# EAGLE board cdf-modular-bridge-rev3 (EAGLE 7.3.0)
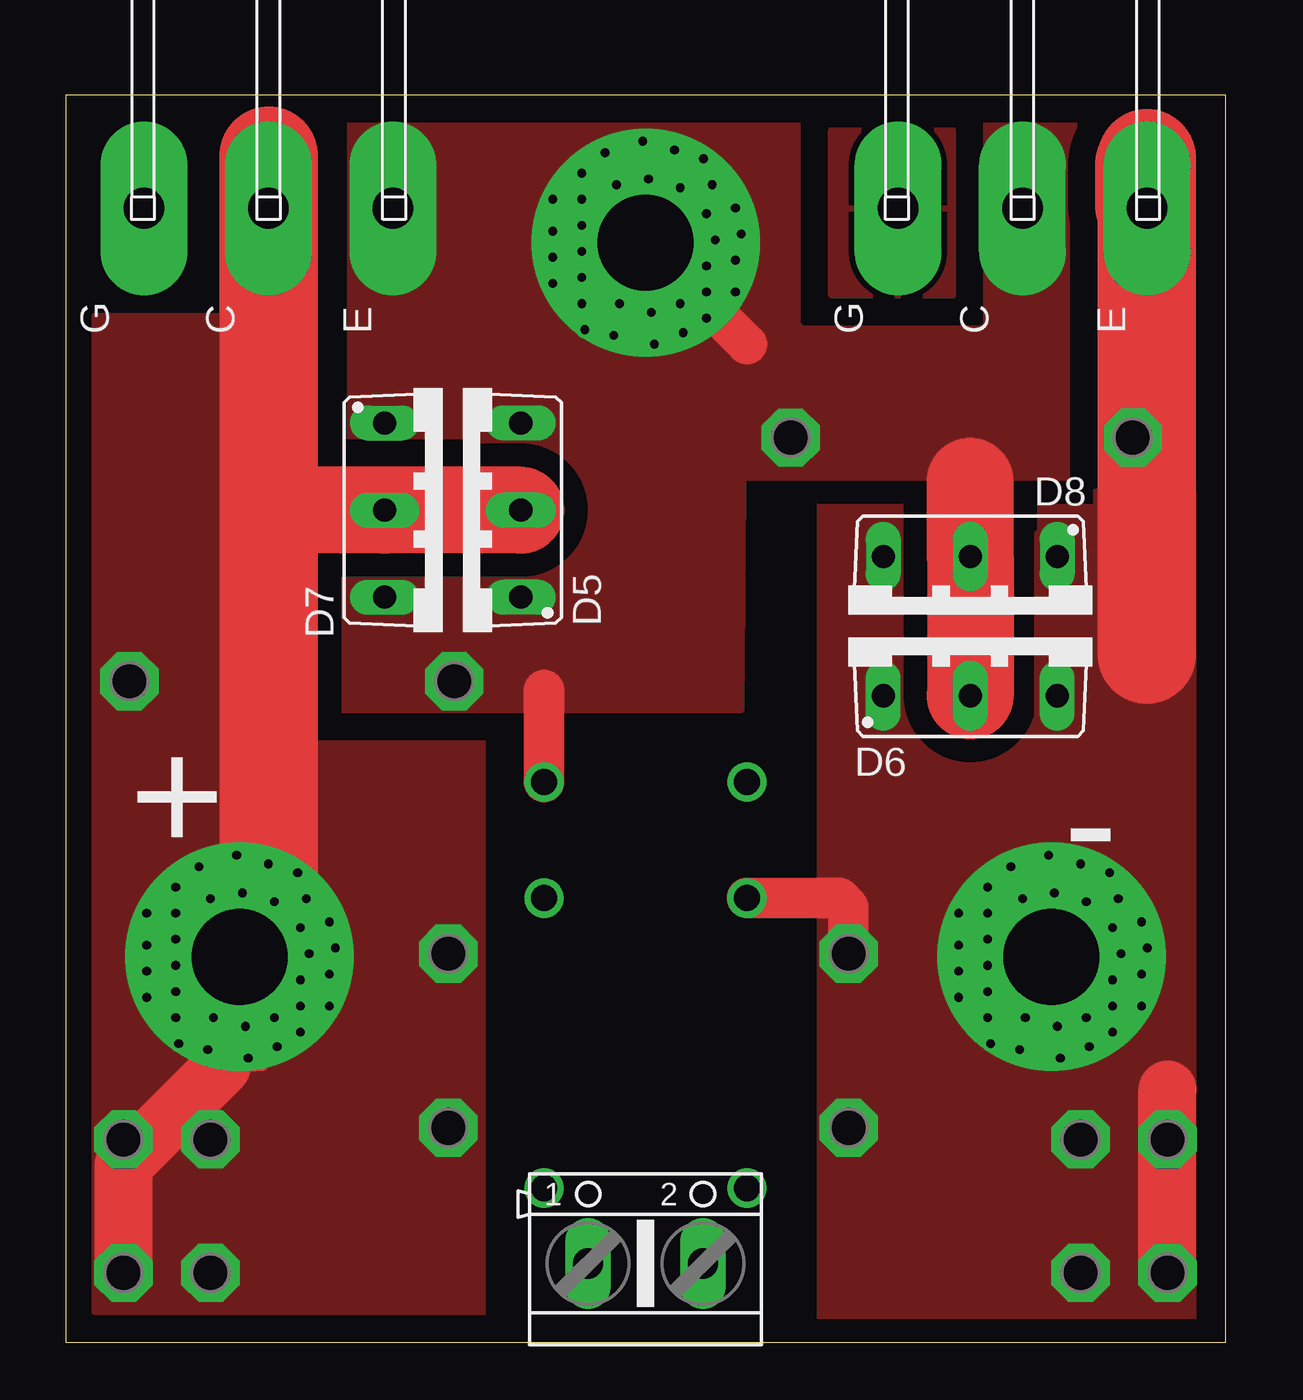
[diagram p0: board, top side]
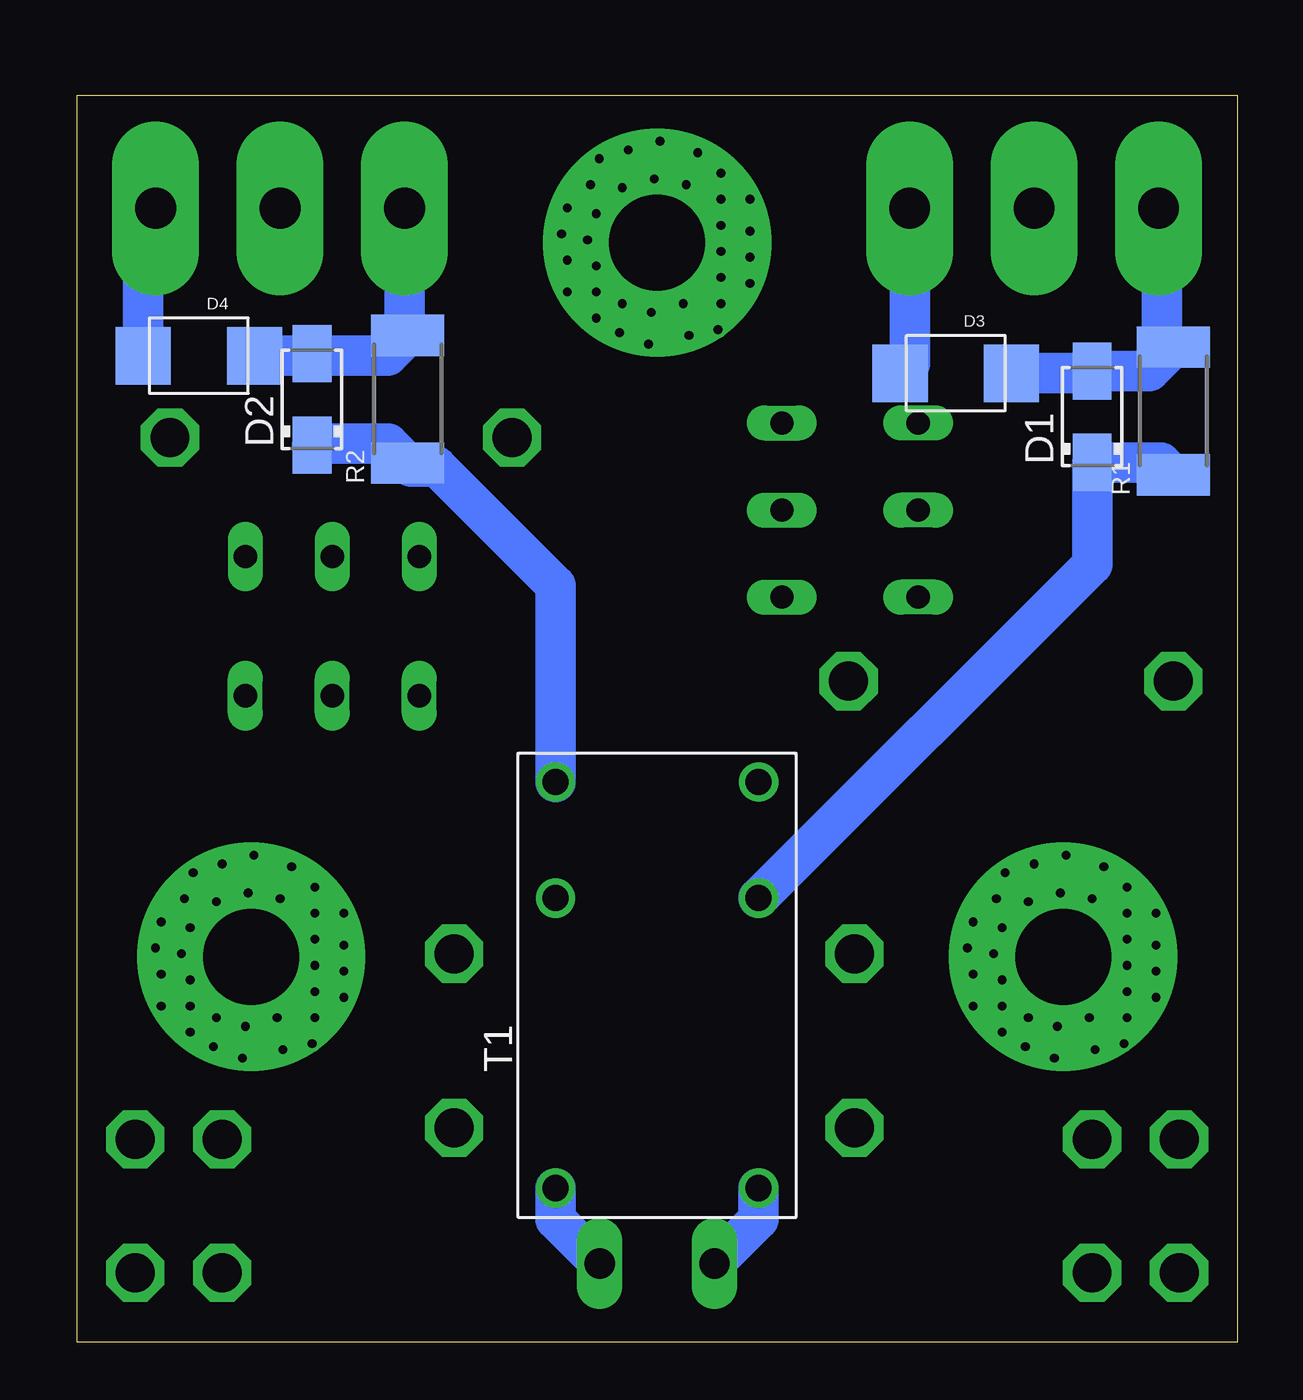
[diagram p1: board, bottom side, seen from below]

Size 50.8 x 54.61 mm. Coordinates in mm from the lower left corner, seen from the top.
Outline: 0,0 50.8,0 50.8,54.61 0,54.61 0,0
Copper layers (1*16): Top 0.0356mm / dielectric 1.5011mm / Bottom 0.0356mm
Design rules "oshpark *": minimum track width 6mil, minimum drill 13mil, track to track 6mil, track to pad 6mil, pad to pad 6mil, via to via 6mil, smd to smd 6mil, copper to edge 15mil, drill to drill 6mil, minimum pad ring 7mil, minimum via ring 7mil, stop-mask expansion 3mil, vias tented up to drill 0mil, thermal gap 10mil

## Footprints (pad centres in the part's own frame; a part is rotated, then mirrored left to right if it is on the bottom)
DO214AC = smd 2.5 x 1.7: A 2,0; C -2,0
TPSMB15CA = smd 2.413 x 2.515: P$1 -2.438,0; P$2 2.438,0
TO220-CDF-SPACED-LEGS = drill 1.016 long: A1 -3.81,-2.54; A2 3.81,-2.54; C 0,-2.54
BIG-ASS-HOLE = drill 4.2 pad 10: X 0,0 | drill 0.381: X@1 -2.794,-2.667; X@2 -2.794,-1.524; X@3 -2.794,-0.381; X@4 -2.794,0.762; X@5 -2.794,1.905; X@6 -2.794,3.048; X@7 2.54,3.683; X@8 2.921,2.54; X@9 -4.064,-1.778; X@10 -4.064,-0.635; X@11 -4.064,0.508; X@12 -4.064,1.905; X@13 2.667,1.27; X@14 3.048,0.127; X@15 2.667,-1.016; X@16 2.667,-2.159; X@17 2.667,-3.302; X@18 3.937,1.524; X@19 4.191,0.381; X@20 3.937,-0.762; X@21 3.937,-2.159; X@22 1.524,2.413; X@23 0.127,2.794; X@24 -1.27,2.54; X@25 -1.778,3.937; X@26 -0.127,4.445; X@27 1.27,4.064; X@28 1.524,-2.667; X@29 1.651,-3.937; X@30 0.254,-3.048; X@31 -1.143,-2.667; X@32 -1.397,-4.064; X@34 0.381,-4.445; X@120 -2.667,-3.81
IXGH40N60A = drill 1.778 pad 3.81 long: C -44.21,0; E -44.21,-5.45; G -44.21,5.45
2512 = smd 1.8 x 3.2: 1 -2.8,0; 2 2.8,0
PULSE-P0584NL = drill 1.143: 1 -12.7,-4.445; 3 0,-4.445; 4 5.08,-4.445; 7 5.08,4.445; 8 0,4.445; 10 -12.7,4.445
P1-17 = drill 1.702 pad 2.54 octagon: TP 0,0
AK500/2 = drill 1.321 long: 1 -2.515,0; 2 2.515,0

## Placement (x,y rotation side)
D1  FM5819-W  [DO214AC]  6.35,40.54 90 bottom
D2  FM5819-W  [DO214AC]  40.51,41.3 90 bottom
D3  TPSMB30CA  [TPSMB15CA]  12.32,42.44 180 bottom
D4  TPSMB30CA  [TPSMB15CA]  45.47,43.21 180 bottom
D5  FMN-2206S2  [TO220-CDF-SPACED-LEGS]  17.4,36.45 90 top
D6  FMN-2206S2  [TO220-CDF-SPACED-LEGS]  39.62,30.86 0 top
D7  FMN-2206S2  [TO220-CDF-SPACED-LEGS]  16.51,36.45 270 top
D8  FMN-2206S2  [TO220-CDF-SPACED-LEGS]  39.62,31.88 180 top
DC+  BIG-ASS-HOLE  [BIG-ASS-HOLE]  7.62,16.89 0 top
DC-  BIG-ASS-HOLE  [BIG-ASS-HOLE]  43.18,16.89 0 top
OUT  BIG-ASS-HOLE  [BIG-ASS-HOLE]  25.4,48.16 0 top
Q1  Ixgh48n60a3  [IXGH40N60A]  8.89,93.88 90 top
Q2  Ixgh48n60a3  [IXGH40N60A]  41.91,93.88 90 top
R1  15 (352115RFT)  [2512]  2.79,40.79 90 bottom
R2  15 (352115RFT)  [2512]  36.32,41.3 90 bottom
T1  PULSE-P0584NL  [PULSE-P0584NL]  25.4,19.46 90 bottom
TP1  PTR1PAD1-17  [P1-17]  2.54,3.05 0 top
TP2  PTR1PAD1-17  [P1-17]  48.26,3.05 0 top
TP3  PTR1PAD1-17  [P1-17]  44.45,3.05 0 top
TP4  PTR1PAD1-17  [P1-17]  6.35,3.05 0 top
TP5  PTR1PAD1-17  [P1-17]  2.54,8.89 0 top
TP6  PTR1PAD1-17  [P1-17]  6.35,8.89 0 top
TP7  PTR1PAD1-17  [P1-17]  44.45,8.89 0 top
TP8  PTR1PAD1-17  [P1-17]  48.26,8.89 0 top
TP9  PTR1PAD1-17  [P1-17]  2.79,28.96 0 top
TP10  PTR1PAD1-17  [P1-17]  16.76,17.02 0 top
TP11  PTR1PAD1-17  [P1-17]  16.76,9.4 0 top
TP12  PTR1PAD1-17  [P1-17]  31.75,39.62 0 top
TP13  PTR1PAD1-17  [P1-17]  17.02,28.96 0 top
TP14  PTR1PAD1-17  [P1-17]  34.29,17.02 0 top
TP15  PTR1PAD1-17  [P1-17]  34.29,9.4 0 top
TP16  PTR1PAD1-17  [P1-17]  46.74,39.62 0 top
X1  [AK500/2]  25.4,3.45 0 top

## Library data of the parts
D1 D2 = s1x_10; MF: Fairchild; MPN: S1A; OC_FARNELL: 9843868; OC_NEWARK: 58K9551
D3-D8 DC+ DC- OUT Q1 Q2 T1 = keves
R1 R2 = microbuilder
TP1-TP16 = testpad
X1 = con-ptr500; OC_FARNELL: unknown; OC_NEWARK: unknown

## Nets
DC+: D5.C D7.C DC+.X DC+.X@1 DC+.X@2 DC+.X@3 DC+.X@4 DC+.X@5 DC+.X@6 DC+.X@7 DC+.X@8 DC+.X@9 DC+.X@10 DC+.X@11 DC+.X@12 DC+.X@13 DC+.X@14 DC+.X@15 DC+.X@16 DC+.X@17 DC+.X@18 DC+.X@19 DC+.X@20 DC+.X@21 DC+.X@22 DC+.X@23 DC+.X@24 DC+.X@25 DC+.X@26 DC+.X@27 DC+.X@28 DC+.X@29 DC+.X@30 DC+.X@31 DC+.X@32 DC+.X@34 DC+.X@120 Q1.C TP1.TP TP4.TP TP5.TP TP6.TP TP9.TP TP10.TP TP11.TP
DC-: D4.P$2 D6.A1 D6.A2 D8.A1 D8.A2 DC-.X DC-.X@1 DC-.X@2 DC-.X@3 DC-.X@4 DC-.X@5 DC-.X@6 DC-.X@7 DC-.X@8 DC-.X@9 DC-.X@10 DC-.X@11 DC-.X@12 DC-.X@13 DC-.X@14 DC-.X@15 DC-.X@16 DC-.X@17 DC-.X@18 DC-.X@19 DC-.X@20 DC-.X@21 DC-.X@22 DC-.X@23 DC-.X@24 DC-.X@25 DC-.X@26 DC-.X@27 DC-.X@28 DC-.X@29 DC-.X@30 DC-.X@31 DC-.X@32 DC-.X@34 DC-.X@120 Q2.E T1.8 TP2.TP TP3.TP TP7.TP TP8.TP TP14.TP TP15.TP TP16.TP
N$1: T1.10 X1.2
N$2: T1.1 X1.1
N$3: D1.A D3.P$1 Q1.G R1.2
N$5: D2.A D4.P$1 Q2.G R2.2
N$7: D2.C R2.1 T1.7
N$8: D1.C R1.1 T1.3
OUT: D3.P$2 D5.A1 D5.A2 D6.C D7.A1 D7.A2 D8.C OUT.X OUT.X@1 OUT.X@2 OUT.X@3 OUT.X@4 OUT.X@5 OUT.X@6 OUT.X@7 OUT.X@8 OUT.X@9 OUT.X@10 OUT.X@11 OUT.X@12 OUT.X@13 OUT.X@14 OUT.X@15 OUT.X@16 OUT.X@17 OUT.X@18 OUT.X@19 OUT.X@20 OUT.X@21 OUT.X@22 OUT.X@23 OUT.X@24 OUT.X@25 OUT.X@26 OUT.X@27 OUT.X@28 OUT.X@29 OUT.X@30 OUT.X@31 OUT.X@32 OUT.X@34 OUT.X@120 Q1.E Q2.C T1.4 TP12.TP TP13.TP

## Tracks (layer width: path | path; a pad name or v marks a point on that pad's centre or on a via)
DC+
  Top 0.406: 6.86,12.09 8.64,12.09
  Top 1.778: 9.27,36.45 8.89,36.83
  Top 2.54: TP1.TP 2.54,7.77 6.86,12.09
  Top 3.81: D5.C D7.C 9.27,36.45
  Top 4.318: 8.89,20.22 8.89,36.83 Q1.C 8.89,51.97
  pour Top (isolate 1.194, rank 3, no thermals): 18.29,27.84 6.86,27.84 6.86,0.38 18.29,0.38
  pour Top (no thermals): 7.87,44.96 7.87,1.32 1.27,1.32 1.27,44.96
DC-
  Top 0.406: TP16.TP 47.36,39.62 47.36,37.59
  Top 1.778: 42.95,16.66 DC-.X | TP14.TP 34.29,19.05 33.88,19.46 T1.8
  Top 2.54: TP2.TP 48.26,11.07
  Top 4.318: 47.36,30.11 47.36,37.59 Q2.E | Q2.E 47.36,51.85 | 47.24,51.59 47.24,49.78 Q2.E
  Bottom 1.778: D4.P$2 47.9,49.12 Q2.E
  pour Top (isolate 1.016, rank 3, no thermals): 49.4,37.24 33.02,37.24 33.02,0.76 49.4,0.76
  pour Top (no thermals): 49.4,9.91 43.18,9.91 43.18,1.32 49.4,1.32
  pour Top (no thermals): 48.77,35.56 42.55,35.43 42.55,26.04 48.77,26.16
N$1
  Bottom 1.778: X1.2 29.84,5.38 T1.10
N$2
  Bottom 1.778: X1.1 20.95,5.38 T1.1
N$3
  Bottom 1.778: D3.P$1 6.45,42.44 D1.A 3.85,42.54 R1.2 3.3,44.1 3.3,49.53 Q1.G
N$5
  Bottom 1.778: D4.P$1 40.61,43.2 D2.A 40.42,43.21 37.21,43.21 36.46,43.96 | 36.46,43.96 R2.2 | Q2.G 36.46,43.96
  pour Top: 33.53,53.09 38.86,53.09 38.86,45.85 33.53,45.85
N$7
  Bottom 1.778: D2.C 40.44,39.37 37.19,39.37 R2.1 36.18,38.35 35.05,38.35 29.84,33.15 T1.7
N$8
  Bottom 1.778: R1.1 3.34,38.54 D1.C 6.35,35.56 6.35,34.95 6.35,34.06 T1.3
OUT
  Top 1.778: 29.84,43.71 OUT.X | 39.62,37.72 40.01,38.1 | T1.4 20.95,28.57
  Top 3.81: 39.62,37.72 D8.C D6.C
  Bottom 1.778: Q1.E 14.34,42.86 D3.P$2
  pour Top (isolate 1.194, rank 2, no thermals): 44.45,55.02 12.45,55.02 12.45,37.87 44.45,37.87
  pour Top (isolate 1.016, no thermals): 11.68,39.37 11.56,27.69 29.59,27.69 29.72,39.62 18.29,39.62 18.29,39.37

## Text on the board
tPlace: + | -
bPlace: CDF MoBridge / rev 3